# EAGLE board 5-BlinkyBoard (EAGLE 7.5.0)

Size 44.12 x 53.33 mm. Coordinates in mm from the lower left corner, seen from the top.
Outline: 0,0 44.12,0 44.12,53.33 0,53.33 0,0
Copper layers (1*16): Top 0.035mm / dielectric 1.5mm / Bottom 0.035mm
Design rules "default": minimum track width 10mil, minimum drill 24mil, track to track 8mil, track to pad 8mil, pad to pad 8mil, via to via 8mil, smd to smd 8mil, copper to edge 40mil, drill to drill 8mil, minimum pad ring 10mil, minimum via ring 8mil, stop-mask expansion 4mil, vias tented up to drill 0mil, thermal gap 10mil

## Footprints (pad centres in the part's own frame; a part is rotated, then mirrored left to right if it is on the bottom)
CR1220-SMD = smd 3.2 x 3.2: +$1 -8.2,0; +$2 8.2,0 | smd 3.9 x 3.9: - 0,0
C0805 = smd 1.3 x 1.5: 1 -0.85,0; 2 0.85,0
SO08 = smd 0.66 x 2.032: 1 -1.905,-3.073; 2 -0.635,-3.073; 3 0.635,-3.073; 4 1.905,-3.073; 5 1.905,3.073; 6 0.635,3.073; 7 -0.635,3.073; 8 -1.905,3.073
CHIPLED_0805 = smd 1.2 x 1.2: A 0,-1.05; C 0,1.05
R0805 = smd 1.1 x 1.4: 1 -1,0; 2 1,0

## Placement (x,y rotation side)
BATT  CR1220  [CR1220-SMD]  16.51,11.43 180 top
C1  .01uF  [C0805]  38.1,20.32 270 top
C2  22mF  [C0805]  31.75,20.32 270 top
IC1  LM555D  [SO08]  20.32,33.02 90 top
LED1  green  [CHIPLED_0805]  34.29,45.72 90 top
LED2  green  [CHIPLED_0805]  13.97,45.72 90 top
R1  1K  [R0805]  36.83,33.02 270 top
R2  100  [R0805]  26.67,45.72 0 top
R3  100K  [R0805]  36.83,39.37 270 top
R4  100  [R0805]  6.35,45.72 0 top

## Library data of the parts
BATT C1 C2 IC1 LED1 LED2 R1-R4 = adafruit

## Nets
CONN: C2.1 IC1.2 IC1.6 R3.1
GND: BATT.- C1.2 C2.2 IC1.1 R4.2
N$1: LED1.C R2.1
N$2: IC1.3 LED2.A R2.2
N$3: LED2.C R4.1
N$4: IC1.7 R1.1 R3.2
N$8: C1.1 IC1.5
VCC: BATT.+$1 BATT.+$2 IC1.4 IC1.8 LED1.A R1.2

## Tracks (layer width: path | path; a pad name or v marks a point on that pad's centre or on a via)
CONN  (3 unrouted)
GND  (4 unrouted)
N$1  (1 unrouted)
N$2  (2 unrouted)
N$3  (1 unrouted)
N$4  (2 unrouted)
N$8  (1 unrouted)
VCC  (5 unrouted)